# Altium PCB PCB1.PcbDoc (part 2 of 2)
Units mm, origin at the board's own origin, x right, y up, seen from the top; angles counter-clockwise.
Board outline 120.73 x 162.56 mm, 2 copper layers (Top Layer, Bottom Layer); 171 components, 125 nets, 579 pads, 168 vias.
Unrouted connection lines stored in the file: 14.
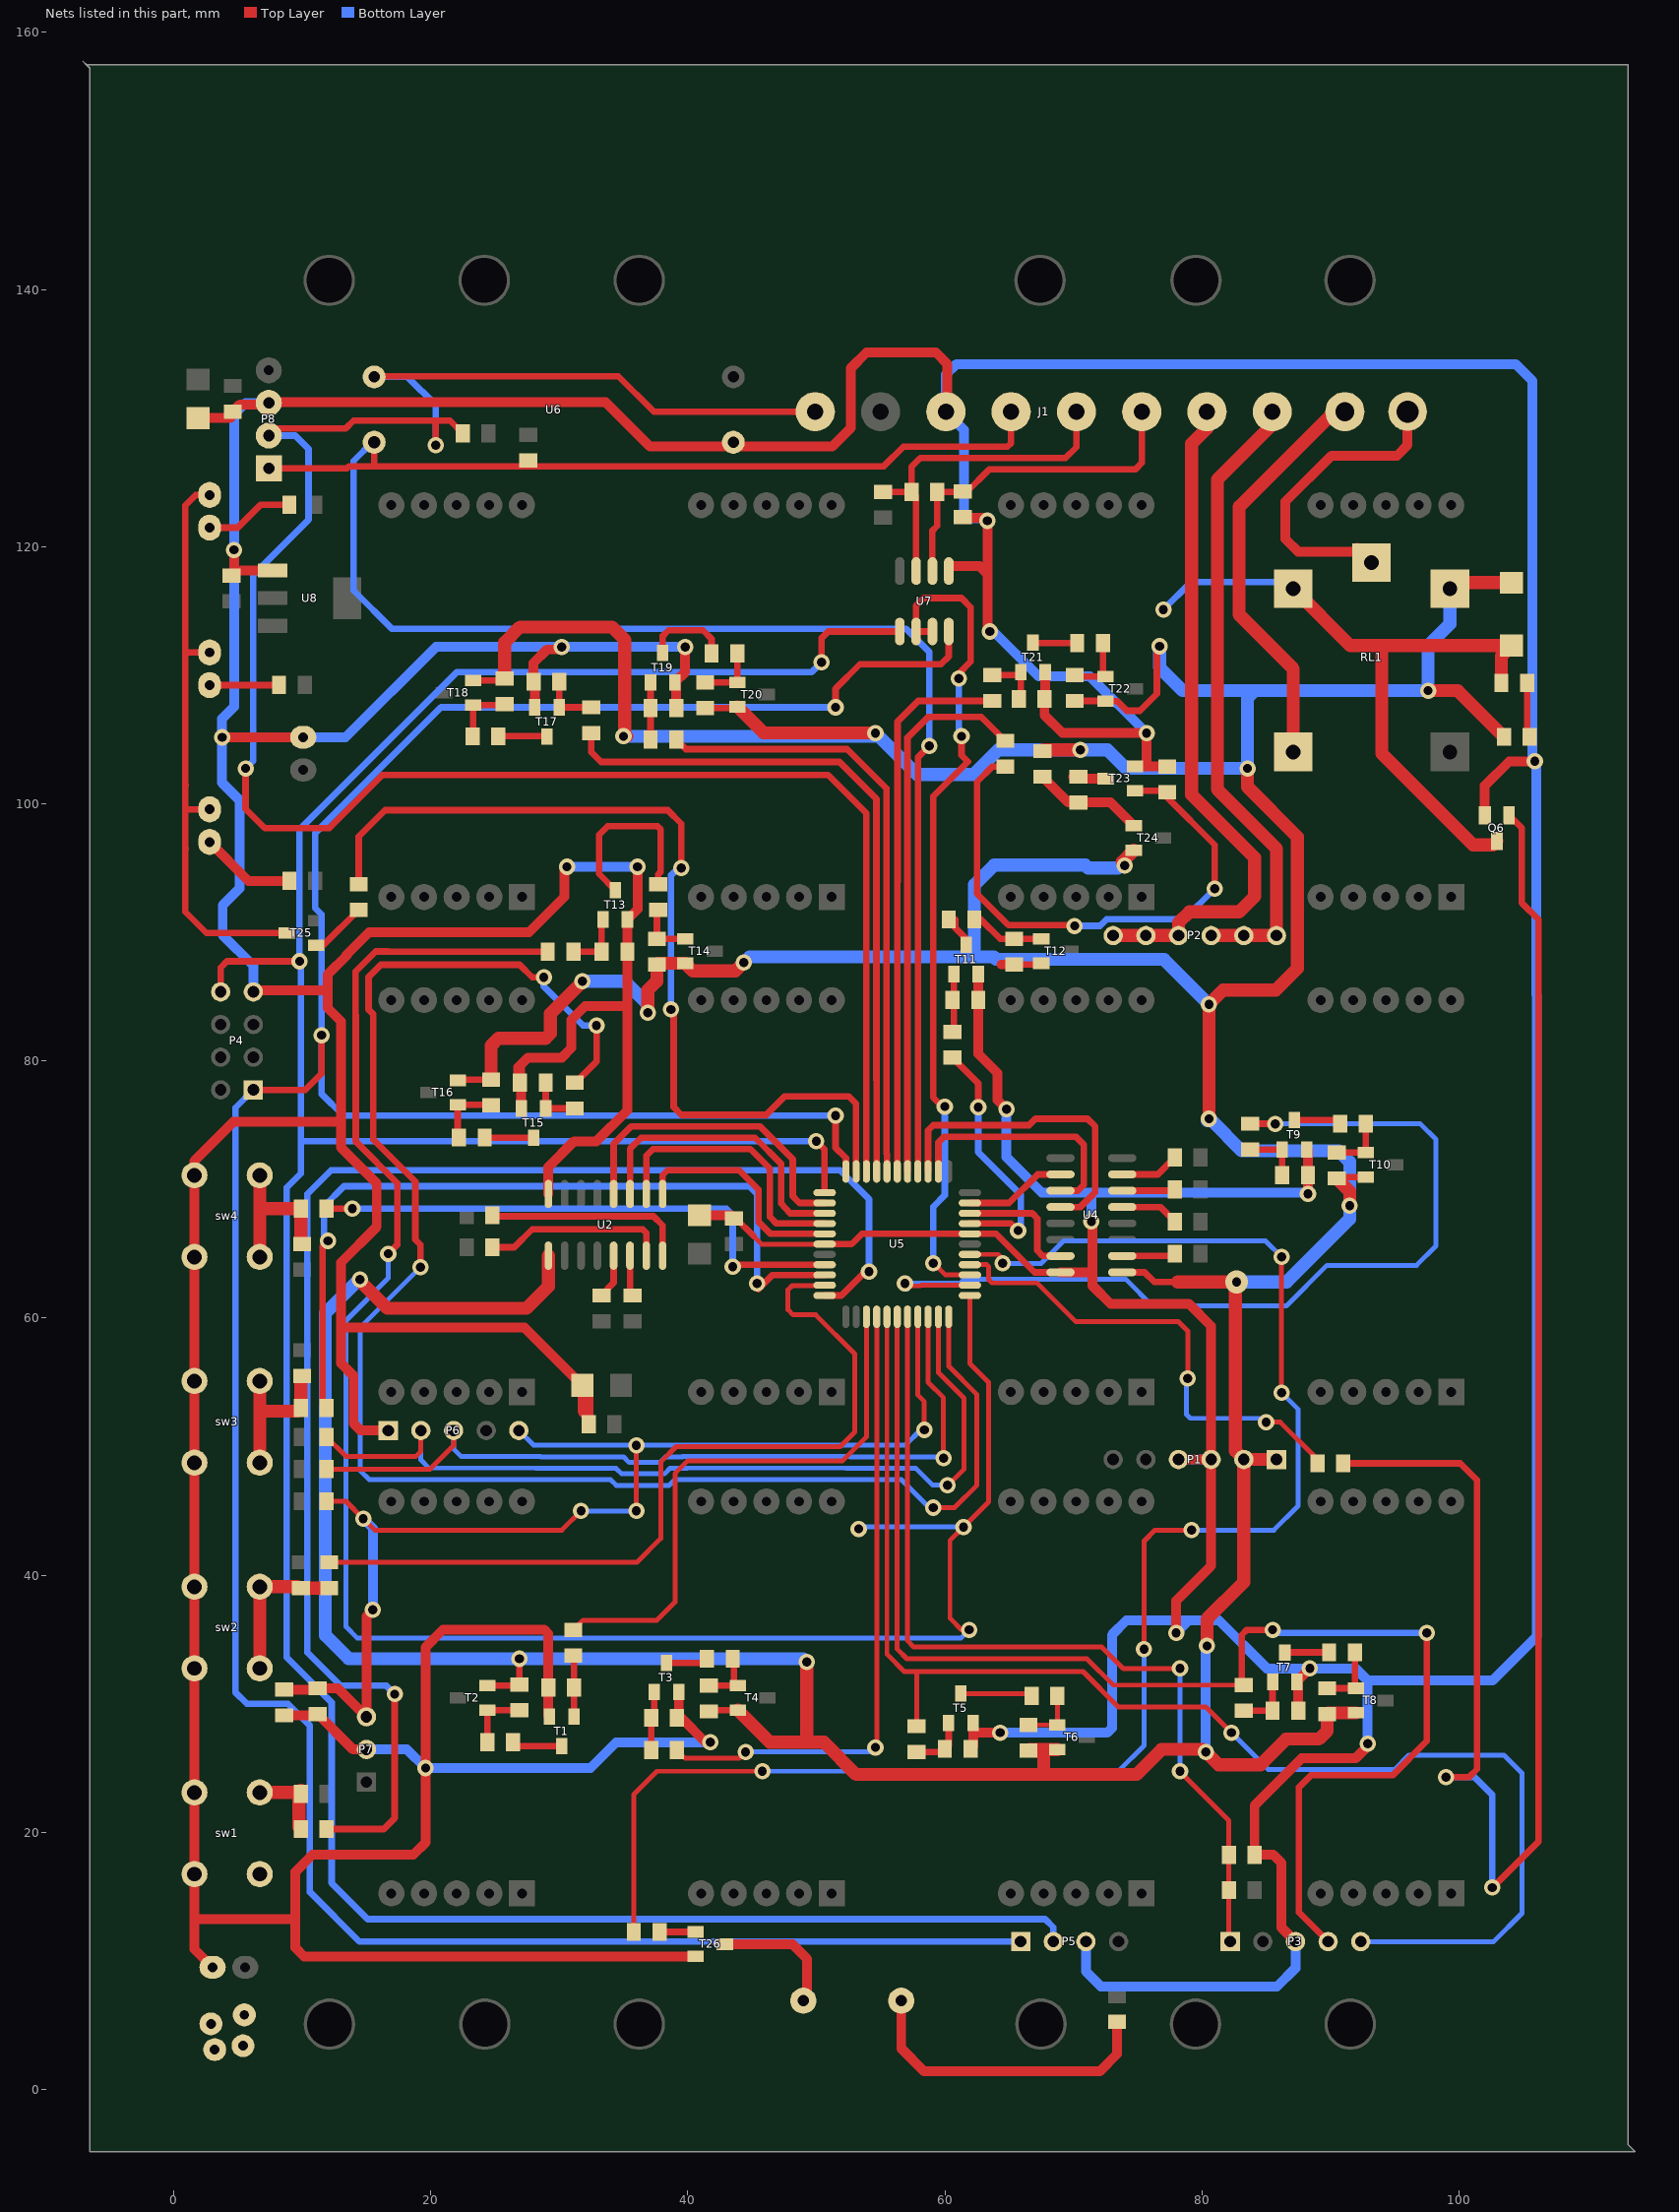
[diagram p2: the nets of this part, all layers, seen from the top]

## Via types
v1: diameter 1.27, hole 0.711, Top Layer to Bottom Layer, 114 vias
v2: diameter 1.524, hole 0.711, Top Layer to Bottom Layer, 53 vias
v3: diameter 1.778, hole 0.711, Top Layer to Bottom Layer, 1 vias

## Nets (pads, with @x,y where several pads share a name; then routed paths per layer and width w, separated by ;. In a path a pad name is that pad's centre, name@x,y a point inside that pad or via, vN(x,y) a via of type N, cw(c..) or ccw(c..) an arc to the next point about the centre after c; other vN are vias at no path point) (continued)
+12: D4.1 D5.2 P1.1 P1.2 R1.2 R2.2 R9.2 R10.2 R17.2 R18.2 R25.2 R26.2 R33.2 R34.2 R41.2 R42.2 RL1.3 T2.2 T4.2 T6.2 T8.2 T10.2 T12.2 T14.2 T16.2 T18.2 T20.2 T22.2 T24.2 U2.9 U4.9 | length 524.9
  Top Layer w0.508: v1@14.5,62.889 v1(14.5,63) ; T16.2@22.1,78.485 22.165,78.55 R26.2@24.7,78.55 ; T18.2@23.31,109.585 R33.2@25.585,109.585 ; T2.2@24.4,31.405 26.805,31.405 R1.2@26.9,31.5 v1(26.9,33.5) ; R34.2@41.35,107.45 T20.2@43.755,107.45 ; R2.2@41.65,29.4 41.745,29.495 T4.2@43.9,29.495 ; R18.2@65.4,87.5 67.405,87.5 T12.2@67.5,87.595 T12.2@67.627,87.468 ; R41.2@70.1,108 72.495,108 T22.2@72.5,107.995 73.389,107.995 74.151,107.233 75.183,107.233 76.5,108.55 76.5,112.25 v1(76.7,112.25) ; U4.9@73.8,63.555 75.545,63.555 76.3,62.8 78.1,62.8 ; R10.2@89.75,29.2 R10.2@89.845,29.295 ; R17.2@90.5,70.861 90.595,70.956 T10.2@92.75,70.956
  Top Layer w0.762: 64.4,87.5 R18.2@65.4,87.5
  Top Layer w1.016: v1@14.5,62.889 16.639,60.75 27.45,60.75 29.155,62.455 U2.9@29.155,64.85 ; R26.2@24.7,78.55 24.7,81.18 25.27,81.75 28.943,81.75 29.323,82.13 29.323,83.677 31.8,86.154 v1(31.8,86.202) ; R33.2@25.75,109.75 25.75,112.55 26.95,113.75 34.1,113.75 35.1,112.75 35.1,105.4 35.25,105.25 v1(35,105.25) ; v1(36.9,83.75) 36.9,85.5 37.6,86.2 R25.2@37.6,87.5 37.695,87.595 T14.2@39.8,87.595 40.395,87 43.7,87 v1(44.35,87.65) ; T20.2@43.85,107.545 45.879,105.516 54.584,105.516 v1(54.6,105.5) ; T4.2@43.9,29.495 46.395,27 49,27 ; v1(49.25,33.25) 49.25,27.25 49,27 ; R9.2@66.5,26.35 66.595,26.445 67.7,26.445 ; R42.2@67.6,104.1 67.7,104.2 v1(70.543,104.2) ; T6.2@68.75,26.445 67.7,26.445 ; v1(74,95.2) 74,95.26 73.783,95.478 T24.2@74.7,96.395 ; 78.1,62.8 v3@82.6,62.8 ; v1(80.4,34.5) 80.4,36.6 83.26,39.46 P1.2@83.26,49 ; v1(80.55,75.5) v1(80.55,84.4) 81.65,85.5 85.75,85.5 87.439,87.189 87.439,97.411 83.55,101.3 v1(83.55,102.75) ; v3(82.7,62.8) v3@82.6,62.8 ; P1.1@85.8,49 P1.2@83.26,49 ; R10.2@89.75,29.2 89.75,27.9 89.1,27.25 86.55,27.25 84.55,25.25 81.3,25.25 v1(80.3,26.25) 80.1,26.45 76.85,26.45 74.9,24.5 67.35,24.5 ; R10.2@89.845,29.295 T8.2@92,29.295 ; R17.2@90.5,70.861 91.5,69.861 v1(91.5,68.75) ; v1(97.6,108.8) 99.9,108.8 D4.1@103.5,105.2 ; RL1.3@99.296,116.734 99.762,117.2 D5.2@104.1,117.2 ; 49,27 50.6,27 53.1,24.5 67.35,24.5 ; 67.35,24.5 67.7,24.85 67.7,26.445 ; v3@82.6,62.8 82.6,49.66 P1.2@83.26,49
  Bottom Layer w0.508: v1(76.7,112.25) v1@76.95,112
  Bottom Layer w0.762: v1@14.411,63 v1(14.5,63) ; 32.6,86.2 32.602,86.202 32.65,86.25 ; v1@44.35,87.5 v1(44.35,87.65) 44.8,88.1 ; v1@49,33.5 v1(49.25,33.25) ; v1(80.3,26.25) 80.3,34.2 80.5,34.4 v1(80.4,34.5)
  Bottom Layer w1.016: v1@14.411,63 11.8,60.389 11.8,35.3 13.6,33.5 v1(26.9,33.5) v1@49,33.5 ; v1(31.8,86.202) 32.602,86.202 35.098,86.202 36.9,84.4 v1(36.9,83.75) ; v1(35,105.25) v1@54.85,105.25 ; 44.8,88.1 62.3,88.1 ; v1(54.6,105.5) v1@54.85,105.25 ; v1(74,95.2) 73.97,95.23 73.681,95.23 73.457,95.006 71.142,95.006 70.918,95.23 63.83,95.23 62.3,93.7 62.3,88.1 ; v1(76.7,112.25) 76.7,110.6 78.5,108.8 84.1,108.8 ; v1(80.55,75.5) 80.4,75.35 80.75,75.35 83.1,73 90.639,73 91.5,72.139 v1(91.5,68.75) 91.5,67.7 86.6,62.8 v3(82.7,62.8) ; v1(80.55,84.4) 77.05,87.9 64,87.9 63.8,88.1 62.3,88.1 ; P1.2@83.26,49 P1.1@85.8,49 ; RL1.3@99.296,116.734 99.296,113.996 97.6,112.3 v1(97.6,108.8) 84.1,108.8 ; v1@54.85,105.25 57.83,102.27 62.22,102.27 64.15,104.2 v1(70.543,104.2) 72.65,104.2 74.1,102.75 v1(83.55,102.75) 83.55,108.25 84.1,108.8
+24V: J1.8 P2.4 P2.5 P2.6 | length 49.5
  Top Layer w1.016: P2.4@80.72,89.75 P2.5@83.26,89.75 P2.6@85.8,89.75 85.8,96.52 81.2,101.12 81.2,125.2 85.48,129.48 J1.8@85.48,130.5
COM: J2.1 RL1.2 | length 25.1
  Top Layer w0.762: RL1.2@93.2,118.766 RL1.2@92.366,119.6 ; J2.1@96,130.5 96,129.2 96,127.9 95.176,127.076 93.876,127.076 90.076,127.076 86.5,123.5 86.5,120.6 87.5,119.6 RL1.2@91.766,119.6 ; RL1.2@91.766,119.6 92.066,119.9 RL1.2@92.366,119.6 ; RL1.2@91.766,119.6 RL1.2@92.366,119.6
GND: C1.2 C2.1 C3.2 C4.2 C5.1 C6.2 C7.2 C8.2 C9.2 C10.2 C11.1 J1.3 P1.3 P1.4 P3.3 P4.4 P5.3 P6.1 P7.2 P8.3 pad.0 pad.1 pad.2 pad.3 Q6.2 R7.2 R8.2 R15.2 R16.2 R23.2 R24.2 R31.2 R32.2 R39.2 R40.2 R47.2 R48.2 R72.1 R84.2 sw1.2 sw1.3 sw2.2 sw2.3 sw3.2 sw3.3 sw4.2 sw4.3 T1.2 T3.2 T5.2 T7.2 T9.2 T11.2 T13.2 T15.2 T17.2 T19.2 T21.2 T23.2 T26.2 U2.8 U4.8 U5.6 U5.29 U6.3 U7.5 U8.1 | length 981.7
  Top Layer w0.381: 45.124,66.374 45.748,65.75 U5.6@50.65,65.75
  Top Layer w0.508: C8.2@43.748,67.75 45.124,66.374 ; U5.6@50.65,65.75 52.75,65.75 53.55,66.55 U5.29@61.95,66.55 63.996,66.55 66.991,63.555 U4.8@69,63.555
  Top Layer w0.762: C1.2@2.3,130 4.4,130 C4.2@4.75,130.35 ; C6.2@3.03,9.5 1.62,10.91 1.62,13.25 ; v1(3.77,105.17) C7.2@10.082,105.17 ; C4.2@4.6,130.5 5.161,131.061 7.4,131.061 P8.3@7.4,131.18 7.444,131.224 33.626,131.224 37.05,127.8 51.25,127.8 52.7,129.25 52.7,133.9 53.9,135.1 59.3,135.1 60.2,134.2 60.2,130.62 J1.3@60.08,130.5 ; v1(4.7,119.75) C5.1@4.7,118.05 ; 5.3,118.15 U8.1@7.7,118.15 ; P4.4@6.2,85.37 6.33,85.5 12,85.5 ; C11.1@8.6,29.1 R84.2@11.1,29.1 ; R84.2@11.2,29.2 13.96,26.44 P7.2@15,26.44 ; 12.9,75.25 4.65,75.25 1.62,72.22 sw4.3@1.62,71.1 sw4.2@1.62,64.75 sw3.3@1.62,55.1 sw3.2@1.62,48.75 sw2.3@1.62,39.1 sw2.2@1.62,32.75 sw1.3@1.62,23.1 sw1.2@1.62,16.75 1.62,13.25 ; 13.2,59.25 27.3,59.25 C9.2@31.8,54.75 ; 13.45,88.25 15.2,90 27.639,90 30.4,92.761 30.4,94.95 30.55,95.1 v1(30.6,95.1) ; 13.483,88.217 12,86.734 12,85.5 ; P6.1@16.7,51.25 14.55,51.25 14,51.8 14,55.5 13.016,56.484 13.016,64.316 15.8,67.1 15.8,70.484 13.024,73.26 13.024,83.076 12,84.1 12,85.5 ; T15.2@27.045,76.3 27.045,78.205 R32.2@26.95,78.3 ; T17.2@28.095,107.5 28.095,109.405 R39.2@28,109.5 28,110.95 29.05,112 v1@29.95,112 ; U2.8@29.155,69.65 29.155,71.755 31.15,73.75 32.9,73.75 35.3,76.15 R31.2@35.3,88.5 35.3,90.995 T13.2@35.305,91 36.1,91.795 v1(36.1,95.1) ; T1.2@29.245,29 29.15,29.095 R7.2@29.15,31.25 29.15,35.45 28.85,35.75 20.95,35.75 19.6,34.4 v1(19.6,25) 19.6,19.2 18.65,18.25 10.8,18.25 9.475,16.925 9.475,13.25 ; v1@29.95,112.25 30.15,112.25 v1(30.2,112.2) ; C10.2@32.3,51.75 C10.2@32.3,52.239 ; 35.3,84.25 35.276,84.274 32.024,84.274 30.95,83.2 30.95,81 30.2,80.25 27.55,80.25 26.95,79.65 ; R40.2@39.1,107.45 39.1,109.355 T19.2@39.005,109.45 39.8,110.245 v1(39.8,112.2) ; T3.2@39.305,30.9 39.305,29.055 R8.2@39.15,28.9 39.5,28.9 41.4,27 v1(41.75,27) ; T26.2@40.6,10.345 10.155,10.345 9.475,11.025 9.475,13.25 ; C3.2@40.9,68 43.35,68 C8.2@43.6,67.75 C8.2@43.748,67.75 ; U7.5@60.305,118.5 62.7,118.5 63.316,117.884 ; R72.1@61.7,122.25 63.25,122.25 63.4,122.1 v1(63.316,122.016) 63.316,117.884 ; R15.2@62,26.5 62.205,26.705 62.205,27.75 ; T5.2@62.205,28.5 62.205,27.75 ; T11.2@62.605,86.75 62.605,84.755 R24.2@62.6,84.75 62.6,80.55 64.1,79.05 64.1,76.95 v1(64.8,76.25) v1@64.612,76.25 ; v1(63.5,113.4) 63.5,113.25 63.316,113.434 63.316,117.884 ; v1(64.3,27.75) 62.205,27.75 ; T21.2@67.805,110.25 67.805,108.205 R47.2@67.75,108.15 67.75,106.9 69.15,105.5 v1(75.7,105.5) ; U4.8@69,63.555 71.445,63.555 71.5,63.5 ; v1(71.4,67.5) 71.5,67.4 71.5,63.5 ; T23.2@74.8,102.905 74.805,102.9 75.7,102.9 ; v1@75.8,105.5 v1(75.7,105.5) ; R48.2@77.3,102.9 75.7,102.9 ; v1(78,35.5) 78,38 80.72,40.72 P1.3@80.72,49 ; P1.4@78.18,49 P1.3@80.72,49 ; P3.3@87.28,11.5 86.2,12.58 86.2,17.6 85.55,18.25 C2.1@84.1,18.25 84.1,22.1 87.75,25.75 91.95,25.75 92.9,26.7 v1(92.9,26.9) ; R16.2@87.5,29.45 87.5,31.605 T7.2@87.405,31.7 87.405,31.755 v1(88.4,32.75) ; T9.2@88.155,73.111 88.25,73.016 R23.2@88.25,71.111 v1(88.25,69.65) ; Q6.2@102,99.1 102,101.4 103.9,103.3 v1(105.9,103.3) ; 1.62,13.25 9.475,13.25 ; C5.1@4.7,118.05 4.7,117.95 C5.1@4.5,117.75 4.45,117.8 C5.1@4.7,118.05 ; R32.2@26.95,78.3 26.95,79.65 ; R32.2@26.95,78.3 26.8,78.45 26.8,79.5 26.95,79.65 ; C9.2@31.8,54.75 31.8,52.739 C10.2@32.3,52.239 ; C9.2@31.8,54.75 32.3,54.25 C10.2@32.3,52.239 ; 71.5,63.5 71.5,62.5 72.9,61.1 79,61.1 80.72,59.38 P1.3@80.72,49 ; 75.7,102.9 v1(75.7,105.5)
  Bottom Layer w0.762: 5.13,100.25 5.13,93.43 3.816,92.116 3.816,89.784 6.2,87.4 P4.4@6.2,85.37 ; 5.15,100.25 3.77,101.63 v1(3.77,105.17) 3.77,106.62 4.7,107.55 v1(4.7,119.75) 4.7,130.3 5.58,131.18 P8.3@7.4,131.18 ; C7.2@10.082,105.17 13.37,105.17 20.4,112.2 ; P7.2@15,26.44 18.16,26.44 v1(19.6,25) 32.432,25 34.432,27 v1(41.75,27) ; 21.8,112.2 20.4,112.2 ; v1(30.6,95.1) v1(36.1,95.1) ; v1(39.8,112.2) v1(30.2,112.2) 20.4,112.2 ; v1(63.316,122.016) 63.5,122.2 61.5,122.2 61.5,129.08 J1.3@60.08,130.5 60.08,133.38 60.9,134.2 104.4,134.2 105.7,132.9 v1@105.7,103.6 ; v1(63.5,113.4) 63.8,113.4 67.3,109.9 71.3,109.9 v1(75.7,105.5) ; v1(64.3,27.75) 72.65,27.75 73,28.1 73,35.35 74.134,36.484 78.984,36.484 ; v1(64.8,76.25) 64.8,72.5 ; 66.675,70.625 64.8,72.5 ; P5.3@70.98,11.5 70.98,9.17 72.15,8 85.85,8 87.28,9.43 P3.3@87.28,11.5 ; v1(71.4,67.5) 71.4,69.55 71.5,69.65 71.212,69.65 71.112,69.75 ; v1(78,35.5) 78.984,36.484 ; P1.4@78.18,49 P1.3@80.72,49 ; v1(88.25,69.65) 88.15,69.75 71.112,69.75 ; v1(92.9,26.9) 92.9,31.8 ; v1(105.9,103.3) 106,103.3 106,85.136 106.043,85.092 106.043,35.243 102.6,31.8 92.9,31.8 ; 64.8,72.5 67.55,69.75 71.112,69.75 ; 78.984,36.484 81.316,36.484 85.05,32.75 v1(88.4,32.75) 91.95,32.75 92.9,31.8
HEADER_G: J1.7 P2.1 P2.2 P2.3 | length 53.1
  Top Layer w1.016: P2.1@73.1,89.75 P2.2@75.64,89.75 P2.3@78.18,89.75 78.18,90.752 79.028,91.6 82.9,91.6 84.1,92.8 84.1,95.8 79.2,100.7 79.2,128 80.4,129.2 J1.7@80.4,130.5
MLRC: C2.2 P3.1 R57.1 U5.18 | length 70.2
  Top Layer w0.381: U5.18@57.1,60.1 57.1,34.9 57.58,34.42 72.2,34.42 73.9,32.72 78.27,32.72 v1(78.3,32.75) ; v1(78.3,24.75) 78.3,24.7 82.1,20.9 C2.2@82.1,18.25 R57.1@82.1,15.5 82.1,11.6 P3.1@82.2,11.5
  Bottom Layer w0.381: v1(78.3,24.75) v1(78.3,32.75)
NetBZ1_1: BZ1.1 R67.1 | length 24.3
  Top Layer w0.762: BZ1.1@56.61,6.9 56.61,3.19 58.4,1.4 72.05,1.4 73.4,2.75 R67.1@73.4,5.25
NetBZ1_2: BZ1.2 T26.3 | length 9.3
  Top Layer w0.762: T26.3@42.886,11.298 48.152,11.298 49.29,10.16 BZ1.2@49.29,7.75
NetD1_1: D1.1 D2.1 D3.1 T25.3 | length 46.1
  Top Layer w0.508: 0.93,96.52 0.9,96.55 ; 0.948,101.452 0.9,101.5 ; 1.17,99.57 D3.1@2.8,99.57 ; D2.1@2.8,111.77 0.92,111.77 0.9,111.75 ; D1.1@2.8,124.02 1.72,124.02 0.9,123.2 0.9,111.75 ; T25.3@8.814,89.952 2.548,89.952 0.9,91.6 0.9,96.55 ; 0.9,96.55 0.9,101.5 ; 0.9,101.5 0.9,111.75
NetD1_2: D1.2 R62.1 | length 6.9
  Top Layer w0.508: D1.2@2.8,121.48 4.98,121.48 6.75,123.25 R62.1@9,123.25
NetD2_2: D2.2 R63.1 | length 5.4
  Top Layer w0.508: D2.2@2.8,109.23 8.18,109.23 R63.1@8.2,109.25
NetD3_2: D3.2 R65.1 | length 7.5
  Top Layer w0.508: R65.1@8.98,93.98 R65.1@9,94
  Top Layer w0.762: D3.2@2.8,97.03 5.83,94 R65.1@9,94
NetD4_2: D4.2 R61.2@105.3,109.4 | length 4.3
  Top Layer w0.508: R61.2@105.3,109.4 105.3,105.4 D4.2@105.5,105.2
NetD5_1: D5.1 Q6.3 R61.1@103.3,109.4 RL1.1 | length 53.7
  Top Layer w1.016: RL1.1@87.104,116.734 91.538,112.3 94,112.3 ; Q6.3@102.95,97.1 102.65,96.8 101.1,96.8 94,103.9 94,112.3 ; R61.1@103.3,109.4 103.3,111.5 D5.1@104.1,112.3 94,112.3
  Bottom Layer w0.508: v1(77,115.1) 79.134,117.234 RL1.1@87.304,117.234
NetJ1_5: J1.5 R58.2 R81.2 U7.7 | length 26.7
  Top Layer w0.508: R81.2@55.2,124.25 R58.2@57.4,124.25 ; U7.7@57.765,118.1 57.765,123.885 R58.2@57.4,124.25 ; J1.5@70.24,130.5 70.24,127.74 69.389,126.889 58.089,126.889 57.4,126.2 R58.2@57.4,124.25
NetJ1_6: J1.6 R58.1 R72.2 U7.6 | length 27.1
  Top Layer w0.508: U7.6@59.035,118.1 59.035,121.25 59.4,121.615 R58.1@59.4,124.25 61.7,124.25 63.45,126 74.81,126 75.32,126.51 J1.6@75.32,130.5
NetJ2_2: J2.2 RL1.5 | length 32.1
  Top Layer w1.016: RL1.5@87.104,104.034 87.104,110.496 82.9,114.7 82.9,123.1 90.3,130.5 J2.2@91.123,130.5
NetQ6_1: Q6.1 R71.1 | length 135.1
  Top Layer w0.508: R71.1@91,48.7 100.1,48.7 101.4,47.4 101.4,24.9 100.8,24.3 v1(99,24.3) ; v1(102.6,15.7) 106.2,19.3 ; Q6.1@103.9,99.1 104.9,98.1 104.9,92.278 106.2,90.978 106.2,19.3 ; 106.2,21.1 106.2,19.3
  Bottom Layer w0.508: v1(99,24.3) 101.2,24.3 102.6,22.9 v1(102.6,15.7)
NetR1_1: R1.1 R4.1 T2.1 | length 5
  Top Layer w0.508: R4.1@24.4,27 T2.1@24.4,29.5 R1.1@26.9,29.5
NetR2_1: R2.1 R6.1 T4.1 | length 4.7
  Top Layer w0.508: R2.1@41.65,31.4 T4.1@43.9,31.4 43.6,31.7 43.6,33.45 R6.1@43.4,33.65
NetR3_1: R3.1 R7.1 T1.1 | length 4.7
  Top Layer w0.508: T1.1@31.15,29 R7.1@31.15,31.25 R3.1@31.15,33.75
NetR4_2: R4.2 T1.3 | length 3.9
  Top Layer w0.508: R4.2@26.4,27 26.686,26.714 T1.3@30.197,26.714
NetR5_1: R5.1 R8.1 T3.1 | length 4.6
  Top Layer w0.508: R5.1@37.15,26.4 R8.1@37.15,28.9 37.4,29.15 T3.1@37.4,30.9
NetR6_2: R6.2 T3.3 | length 3.3
  Top Layer w0.508: T3.3@38.352,33.186 41.186,33.186 R6.2@41.5,33.5
NetR9_1: R9.1 R12.1 T6.1 | length 4.5
  Top Layer w0.381: R9.1@66.5,28.35 T6.1@68.75,28.35 R12.1@68.75,30.6
NetR10_1: R10.1 R14.1 T8.1 | length 5.1
  Top Layer w0.508: R10.1@89.75,31.2 T8.1@92,31.2 91.9,31.3 R14.1@91.9,34
NetR11_1: R11.1 R15.1 T5.1 | length 4.5
  Top Layer w0.381: R15.1@59.8,26.25 R15.1@60.3,26.75
  Top Layer w0.508: R11.1@57.8,26.25 R15.1@59.8,26.25 ; R15.1@60.3,26.75 T5.1@60.3,28.5
NetR12_2: R12.2 T5.3 | length 5.6
  Top Layer w0.381: T5.3@61.252,30.786 65.836,30.786 66.564,30.786 R12.2@66.75,30.6
NetR13_1: R13.1 R16.1 T7.1 | length 4.5
  Top Layer w0.508: R13.1@83.25,29.45 R16.1@85.5,29.45 T7.1@85.5,31.7
NetR14_2: R14.2 T7.3 | length 3.5
  Top Layer w0.508: T7.3@86.452,33.986 86.466,34 R14.2@89.9,34
NetR17_1: R17.1 R20.1 T10.1 | length 4.5
  Top Layer w0.508: R17.1@90.5,72.861 T10.1@92.75,72.861 R20.1@92.75,75.111
NetR18_1: R18.1 R22.1 T12.1 | length 5.3
  Top Layer w0.508: R22.1@62.8,91 64.3,89.5 R18.1@65.4,89.5 T12.1@67.5,89.5
NetR19_1: R19.1 R23.1 T9.1 | length 4.5
  Top Layer w0.508: R19.1@83.75,73.111 T9.1@86.25,73.111 R23.1@86.25,71.111
NetR20_2: R20.2 T9.3 | length 3.7
  Top Layer w0.508: T9.3@87.202,75.397 90.464,75.397 R20.2@90.75,75.111
NetR21_1: R21.1 R24.1 T11.1 | length 4.3
  Top Layer w0.508: R21.1@60.6,82.5 60.7,82.6 T11.1@60.7,86.75
NetR22_2: R22.2 T11.3 | length 2.3
  Top Layer w0.508: R22.2@60.8,91 60.8,90.35 61.653,89.497 T11.3@61.653,89.036
NetR25_1: R25.1 R28.1 T14.1 | length 4.5
  Top Layer w0.508: R28.1@37.7,91.75 37.6,91.65 R25.1@37.6,89.5 T14.1@39.8,89.5
NetR26_1: R26.1 R30.1 T16.1 | length 5.2
  Top Layer w0.508: R30.1@22.2,74.05 22.1,74.15 T16.1@22.1,76.58 24.67,76.58 R26.1@24.7,76.55
NetR27_1: R27.1 R31.1 T13.1 | length 4.7
  Top Layer w0.508: R27.1@31.1,88.5 R31.1@33.3,88.5 33.3,90.9 T13.1@33.4,91
NetR28_2: R28.2 T13.3 | length 14.3
  Top Layer w0.508: T13.3@34.352,93.286 33.1,94.539 33.1,97.6 33.75,98.25 37.65,98.25 37.9,98 37.9,94.719 37.7,94.519 R28.2@37.7,93.75
NetR29_1: R29.1 R32.1 T15.1 | length 4.3
  Top Layer w0.508: R32.1@28.95,78.3 T15.1@28.95,76.3 R29.1@31.2,76.3
NetR30_2: R30.2 T15.3 | length 3.8
  Top Layer w0.508: R30.2@24.2,74.05 24.236,74.014 T15.3@27.997,74.014
NetR33_1: R33.1 R36.1 T18.1 | length 4.9
  Top Layer w0.508: R36.1@23.25,105.25 23.31,105.31 T18.1@23.31,107.68 25.68,107.68 R33.1@25.75,107.75
NetR34_1: R34.1 R38.1 T20.1 | length 4.8
  Top Layer w0.508: R34.1@41.35,109.45 T20.1@43.85,109.45 R38.1@43.85,111.7
NetR35_1: R35.1 R39.1 T17.1 | length 4.2
  Top Layer w0.508: R39.1@30,109.5 T17.1@30,107.5 R35.1@32.25,107.5
NetR36_2: R36.2 T17.3 | length 3.8
  Top Layer w0.508: R36.2@25.25,105.25 29.011,105.25 T17.3@29.047,105.214
NetR37_1: R37.1 R40.1 T19.1 | length 4.5
  Top Layer w0.508: R37.1@37.1,105 R40.1@37.1,107.45 T19.1@37.1,109.45
NetR38_2: R38.2 T19.3 | length 6.7
  Top Layer w0.508: T19.3@38.053,111.736 38.053,113.053 38.5,113.5 41.175,113.5 41.85,112.825 R38.2@41.85,111.7
NetR41_1: R41.1 R44.1 T22.1 | length 5.1
  Top Layer w0.508: R41.1@70.1,110 70.2,109.9 T22.1@72.5,109.9 72.3,110.1 R44.1@72.3,112.5
NetR42_1: R42.1 R46.1 T24.1 | length 8.7
  Top Layer w0.762: R42.1@67.6,102.1 69.6,100.1 R46.1@70.4,100.1 72.9,100.1 T24.1@74.7,98.3
NetR43_1: R43.1 R47.1 T21.1 | length 4.5
  Top Layer w0.508: R43.1@63.7,110 65.65,110 T21.1@65.9,110.25 65.9,108.3 R47.1@65.75,108.15
NetR44_2: R44.2 T21.3 | length 3.5
  Top Layer w0.508: T21.3@66.853,112.536 66.888,112.5 R44.2@70.3,112.5
NetR45_1: R45.1 R48.1 T23.1 | length 43.7
  Top Layer w0.508: R45.1@64.7,102.9 63.7,102.9 62.5,101.7 62.5,93 64.942,90.558 70.042,90.558 v1(70.1,90.5) ; T23.1@74.8,101 77.2,101 R48.1@77.3,100.9 77.3,100.5 81,96.8 v1(81,93.4)
  Bottom Layer w0.508: v1(70.1,90.5) 72.071,90.5 72.579,91.008 78.608,91.008 v1(81,93.4)
NetR46_2: R46.2 T23.3 | length 2.6
  Top Layer w0.762: R46.2@70,102.1 70.148,101.953 T23.3@72.514,101.953
NetR49_1: R49.1 U2.16 | length 16
  Top Layer w0.508: R49.1@24.8,68 24.8,67.915 37.335,67.915 38.045,67.205 U2.16@38.045,64.85
NetR50_1: R50.1 U2.15 | length 14.4
  Top Layer w0.508: R50.1@24.8,65.5 26.501,65.5 27.9,66.899 36.501,66.899 36.775,66.625 U2.15@36.775,64.85
NetR51_1: R51.1 U2.14 | length 3.2
  Top Layer w0.508: U2.14@35.505,64.85 35.505,61.945 R51.1@35.7,61.75
NetR52_1: R52.1 U2.13 | length 3.5
  Top Layer w0.508: R52.1@33.3,61.75 33.3,61.815 34.235,62.75 U2.13@34.235,64.85
NetR53_1: R53.1 U4.15 | length 4.6
  Top Layer w0.508: U4.15@73.8,71.175 76.575,71.175 R53.1@77.9,72.5
NetR54_1: R54.1 U4.14 | length 4.1
  Top Layer w0.508: U4.14@73.8,69.905 77.805,69.905 R54.1@77.9,70
NetR55_1: R55.1 U4.13 | length 4.6
  Top Layer w0.508: U4.13@73.8,68.635 76.765,68.635 R55.1@77.9,67.5
NetR56_1: R56.1 U4.10 | length 4.2
  Top Layer w0.508: U4.10@73.8,64.825 77.725,64.825 R56.1@77.9,65
NetR61_2: R61.2@14.4,91.75 T25.1 | length 4.4
  Top Layer w0.508: T25.1@11.1,89 11.65,89 R61.2@14.4,91.75
NetR64_1: R64.1 R73.1 sw1.1 sw1.4 | length 6.2
  Top Layer w1.016: sw1.4@6.7,23.1 R73.1@9.75,23.1 ; R64.1@9.9,20.25 9.75,20.4 R73.1@9.75,23.1 ; R73.1@9.9,23.25 R73.1@9.75,23.1
NetR66_1: R66.1 R74.1 sw2.1 sw2.4 | length 11.4
  Top Layer w1.016: sw2.1@6.7,32.75 sw2.4@6.7,39.1 R74.1@9.6,39.1 ; R74.1@9.9,39 R66.1@12.1,39
NetR68_2: R68.2 T26.1 | length 2.8
  Top Layer w0.508: R68.2@37.8,12.25 T26.1@40.6,12.25
NetR69_1: R69.1 R75.1 sw3.1 sw3.4 | length 12.2
  Top Layer w1.016: sw3.1@6.7,48.75 6.7,52.75 ; sw3.4@6.7,55.1 6.7,52.75 ; R75.1@9.9,55.5 R69.1@9.9,53 9.65,52.75 6.7,52.75
NetR70_1: R70.1 R76.1 sw4.1 sw4.4 | length 12.4
  Top Layer w1.016: sw4.1@6.7,64.75 6.7,68.25 ; sw4.4@6.7,71.1 6.7,68.25 ; R76.1@9.8,65.75 9.9,65.85 R70.1@9.9,68.5 6.95,68.5 6.7,68.25
NetR71_2: R71.2 U5.26 | length 38.2
  Top Layer w0.381: U5.26@61.95,64.15 63.25,64.15 63.421,63.979 63.421,62.98 63.671,62.73 67.17,62.73 70.189,59.711 78.19,59.711 78.9,59 v1(78.9,55.3) ; v1(85,51.9) 86.1,51.9 89,49 R71.2@89,48.7
  Bottom Layer w0.381: v1(78.9,55.3) 78.8,55.2 78.8,52.5 79.1,52.2 84.7,52.2 v1(85,51.9)
RA0: C11.2 P6.5 P7.3 R77.1 R84.1 U5.19 | length 95.5
  Top Layer w0.381: R77.1@11.9,45.75 13.4,45.75 v1(14.75,44.4) 15.65,43.5 30.2,43.5 v1(31.7,45) ; v1(36,45) v1(36,50.1) ; U5.19@57.9,60.1 57.9,54 58.4,53.5 v1(58.4,51.3)
  Top Layer w0.762: C11.2@8.6,31.1 R84.1@11.2,31.1 ; R84.1@11.2,31.2 12.78,31.2 P7.3@15,28.98 15,36.8 v1(15.5,37.3)
  Bottom Layer w0.381: P6.5@26.86,51.25 27.998,50.111 28.915,50.111 28.926,50.1 v1(36,50.1) 39.214,50.1 39.225,50.111 47.935,50.111 53.015,50.111 53.026,50.1 56.926,50.1 58.126,51.3 v1(58.4,51.3) ; v1(31.7,45) v1(36,45)
  Bottom Layer w0.762: v1(14.75,44.4) 15.5,43.65 v1(15.5,37.3)
RA1: P6.3 R59.2 U5.20 | length 63.5
  Top Layer w0.381: R59.2@11.9,48.25 19.95,48.25 21.78,50.08 P6.3@21.78,51.25 ; U5.20@58.7,60.1 58.7,55 59.9,53.8 v1(59.9,49.1)
  Bottom Layer w0.381: P6.3@21.78,51.25 21.78,49.82 22.378,49.222 28.547,49.222 28.558,49.211 35.003,49.211 35.448,48.766 37.819,48.766 38.264,49.211 39.582,49.211 39.593,49.222 52.647,49.222 52.658,49.211 59.789,49.211 v1(59.9,49.1)
RA2: P6.2 R60.2 U5.21 | length 68.7
  Top Layer w0.381: R60.2@11.9,50.75 13.4,49.25 18.85,49.25 19.24,49.64 P6.2@19.24,51.25 ; U5.21@59.5,60.1 59.5,55.75 61.5,53.75 61.5,48.25 60.25,47 v1(60.2,47)
  Bottom Layer w0.381: P6.2@19.24,51.25 19.24,48.96 19.867,48.333 28.178,48.333 28.193,48.319 34.412,48.319 34.854,47.877 38.187,47.877 38.632,48.322 39.95,48.322 39.962,48.333 52.278,48.333 52.29,48.322 57.728,48.322 59.05,47 v1(60.2,47)
RA3_SEGMENT_CONTROL_8: R29.2 U5.22 | length 131.6
  Top Layer w0.381: v1(59.1,45.25) 60.75,45.25 62.5,47 62.5,54.05 60.3,56.25 U5.22@60.3,60.1
  Top Layer w0.508: v1(19.2,63.95) 19.2,65.7 18.8,66.1 18.8,70.616 15.543,73.873 15.543,83.61 15.162,83.991 15.162,86.525 16.121,87.484 26.916,87.484 27.892,86.508 v1@28.392,86.508 ; R29.2@31.2,78.3 31.25,78.3 32.9,79.95 v1(32.9,82.75)
  Bottom Layer w0.381: v1(19.2,63.95) 14.5,59.25 14.5,48.15 15.206,47.444 27.81,47.444 27.824,47.43 33.99,47.43 34.432,46.988 38.556,46.988 39,47.433 40.318,47.433 40.33,47.444 41.75,47.444 41.762,47.433 42.858,47.433 42.87,47.444 44.29,47.444 44.302,47.433 45.398,47.433 45.41,47.444 46.83,47.444 46.842,47.433 47.938,47.433 47.95,47.444 49.37,47.444 49.382,47.433 50.478,47.433 50.49,47.444 51.91,47.444 51.922,47.433 56.617,47.433 58.8,45.25 v1(59.1,45.25)
  Bottom Layer w0.508: v1(28.8,86.508) 28.8,85.8 31.85,82.75 v1(32.9,82.75)
RA4_SEGMENT_CONTROL_7: R27.2 U5.23 | length 156
  Top Layer w0.381: v1@53.2,43.5 v1(53.3,43.6) ; v1(61.9,35.75) 61.3,35.75 60.4,36.65 60.4,42.7 v1(61.45,43.75) 63.4,45.7 63.4,55 61.95,56.45 U5.23@61.95,61.75
  Top Layer w0.508: v1(16.7,65) 17.4,65.7 17.4,70.5 14.167,73.733 14.167,83.549 14.146,83.57 14.146,86.946 15.716,88.516 16.671,88.516 16.687,88.5 R27.2@29.1,88.5
  Bottom Layer w0.381: v1(16.7,65) 16.7,63.1 13.4,59.8 13.4,36 14.3,35.1 61.25,35.1 v1(61.9,35.75) ; v1@53.3,43.5 v1@53.4,43.6 ; v1(53.3,43.6) v1@53.4,43.6 ; v1(61.45,43.75) 53.55,43.75 v1@53.4,43.6
RA5_SEGMENT_CONTROL_5: R19.2 U5.24 | length 73.5
  Top Layer w0.381: v1(56.9,62.7) 57.1,62.5 58.094,62.5 58.144,62.55 U5.24@61.95,62.55
  Top Layer w0.508: R19.2@83.75,75.111 85.689,75.111 v1(85.7,75.1)
  Bottom Layer w0.381: v1@57.1,62.25 56.65,62.7 v1(56.9,62.7) 61.175,62.7 61.475,63 74.1,63 76.148,60.952 86.587,60.952 89.735,64.1 96.7,64.1 98.2,65.6 98.2,73.9 97,75.1 v1(85.7,75.1)
RA6_DATA_LINE_H: U4.7 U5.31 | length 9.9
  Top Layer w0.508: U5.31@61.95,68.15 65.3,68.15 66.8,68.15 67.2,67.75 67.2,65.25 67.625,64.825 U4.7@69,64.825
RA7_SEGMENT_CONTROL_6: R21.2 U5.30 | length 19.8
  Top Layer w0.508: R21.2@60.6,80.25 62.6,78.25 v1(62.6,76.4) ; U5.30@61.95,67.35 65.15,67.35 v1(65.7,66.8)
  Bottom Layer w0.508: v1@62.6,76.5 v1(62.6,76.4) 62.6,72.9 65.9,69.6 65.9,67 v1(65.7,66.8)
RB1_SW3: R69.2 U5.9 | length 63.8
  Top Layer w0.508: R69.2@11.9,53 11.6,53.3 11.6,65.6 v1(12,66) ; v1(45.4,62.7) 45.4,62.35 45.5,62.25 46.6,63.35 U5.9@50.65,63.35
  Bottom Layer w0.508: v1(12,66) 11.702,66.298 11.702,68.702 13.25,70.25 44.8,70.25 45.4,69.65 45.4,62.75 v1(45.4,62.7)
RB2_SW2: R66.2 U5.10 | length 65.8
  Top Layer w0.381: R66.2@12.1,41 36.05,41 37.9,42.85 37.9,48.8 39.1,50 51.85,50 53,51.15 53,57.2 49.95,60.25 48.2,60.25 47.8,60.65 47.8,62.2 48.125,62.525 49.627,62.525 50.625,62.525 U5.10@50.65,62.55
RB3_SW1: R64.2 U5.11 | length 114.4
  Top Layer w0.508: R64.2@11.9,20.25 16.35,20.25 17.2,21.1 v1(17.2,30.75) ; U5.11@50.65,61.75 51.95,61.75 53.8,63.6 v1(54.1,63.6)
  Bottom Layer w0.508: v1(17.2,30.75) 16.55,31.4 13,31.4 10.4,34 10.4,69.65 12.25,71.5 51.85,71.5 54.1,69.25 v1(54.1,63.6)
RB4_SEGMENT_CONTROL_1: R3.2 U5.14 | length 44.6
  Top Layer w0.381: R3.2@31.1,35.75 31.85,36.5 37.6,36.5 39,37.9 39,47.9 40,48.9 52.05,48.9 53.9,50.75 53.9,58.75 ; 53.9,58.339 53.9,58.75 ; U5.14@53.9,60.1 53.9,58.75
RB5_SEGMENT_CONTROL_2: R5.2 U5.15 | length 49.8
  Top Layer w0.381: R5.2@39.15,26.4 39.8,25.75 44,25.75 v1(44.5,26.25) ; v1(54.6,26.6) 54.7,26.7 U5.15@54.7,60.1 U5.15@54.6,60
  Bottom Layer w0.381: v1(44.5,26.25) 54.25,26.25 v1(54.6,26.6)
RB6_SEGMENT_CONTROL_3: P3.5 R11.2 U5.16 | length 109
  Top Layer w0.381: U5.16@55.5,60.1 55.5,33.85 56.85,32.5 57.7,32.5 ; R11.2@57.8,28.25 57.8,32.4 57.7,32.5 ; v1(82.3,27.75) 80.3,29.75 73.5,29.75 70.75,32.5 57.7,32.5
  Bottom Layer w0.381: v1(82.3,27.75) 85.15,24.9 95,24.9 96.1,26 103.5,26 104.9,24.6 104.9,13.7 102.7,11.5 P3.5@92.36,11.5
RB7_SEGMENT_CONTROL_4: P3.4 R13.2 U5.17 | length 105.7
  Top Layer w0.381: U5.17@56.3,60.1 56.3,34.25 57.05,33.5 71.05,33.5 73.1,31.45 R13.2@83.25,31.45
  Top Layer w0.508: R13.2@83.25,31.45 83.1,31.6 83.1,35.35 83.5,35.75 v1(85.5,35.75) ; P3.4@89.82,11.5 87.552,13.768 87.552,23.503 88.486,24.436 94.836,24.436 97.5,27.1 v1(97.5,35.5)
  Bottom Layer w0.381: v1@97.25,35.75 v1(97.5,35.5)
  Bottom Layer w0.508: v1(85.5,35.75) 85.75,35.5 v1(97.5,35.5)
RBO_SW4: R70.2 U5.8 | length 43
  Top Layer w0.508: R70.2@11.9,68.5 v1(13.9,68.5) ; v1(43.5,64) 43.65,64.15 U5.8@50.65,64.15
  Bottom Layer w0.508: v1(13.9,68.5) 43,68.5 43.5,68 v1(43.5,64)
RC0_DATA_LINE_E: U4.2 U5.32 | length 8
  Top Layer w0.508: U5.32@61.95,68.95 65,68.95 67.225,71.175 U4.2@69,71.175
RC1_DATA_LINE_F: U4.3 U5.35 | length 19.1
  Top Layer w0.508: U5.35@59.5,71.4 59.5,73.661 59.95,74.111 70.189,74.111 70.8,73.5 70.8,70.35 70.355,69.905 U4.3@69,69.905
RC2_DATA_LINE_G: U4.4 U5.36 | length 26.5
  Top Layer w0.508: U5.36@58.7,71.4 58.7,74.6 59.1,75 66.55,75 67.05,75.5 71.1,75.5 71.689,74.911 71.689,69.793 71.5,69.604 ; U4.4@69,68.635 70.531,68.635 ; 70.531,68.635 71.5,69.604 ; 70.531,68.635 70.585,68.635 71.5,69.55 71.5,69.604
RC5_LED_SWITCHING: R61.1@14.4,93.75 U5.43 | length 73.5
  Top Layer w0.508: R61.1@14.4,93.75 14.4,97.45 16.45,99.5 38.45,99.5 39.5,98.45 v1(39.5,95) ; v1(38.7,84) 38.85,84 38.9,83.95 38.9,76.406 39.5,75.806 46.106,75.806 47.55,77.25 52.511,77.25 53.1,76.661 U5.43@53.1,71.4
  Bottom Layer w0.508: v1(38.7,84) 38.7,94.45 39.4,95.15 39.5,95.05 v1(39.5,95)
RC6_TX: P4.1 P5.1 U5.44 U7.4 | length 256.6
  Top Layer w0.508: P4.1@6.2,77.75 10.25,77.75 11.5,79 v1(11.5,82) ; v1(51.5,75.75) 51.5,73.25 52.3,72.45 U5.44@52.3,71.4 ; v1(51.5,107.5) 51.5,108.95 53.4,110.85 59.7,110.85 60.305,111.455 U7.4@60.305,113.4
  Bottom Layer w0.508: P4.1@6.2,77.75 4.809,76.359 4.809,76.344 4.803,76.338 4.803,30.897 5.7,30 8.9,30 10.6,28.3 10.6,15.35 14.45,11.5 P5.1@65.9,11.5 ; v1(51.5,75.75) 13.2,75.75 11.5,77.45 v1(11.5,82) 11.5,91.4 11,91.9 11,97.7 20.8,107.5 v1(51.5,107.5)
RC7_RX: P4.8 P5.2 U5.1 U7.1 | length 249
  Top Layer w0.508: P4.8@3.66,85.37 3.66,87.26 4.15,87.75 v1(9.8,87.75) ; v1(50,73.75) 50.65,73.1 U5.1@50.65,69.75 ; v1(50.4,111) 50.4,112.875 50.925,113.4 U7.1@56.495,113.4
  Bottom Layer w0.508: 9.8,71.15 8.8,70.15 8.8,33.6 12.3,30.1 12.3,16.05 15.1,13.25 67.8,13.25 68.44,12.61 P5.2@68.44,11.5 ; 9.9,71.25 9.9,87.65 v1(9.8,87.75) 9.8,98 22.05,110.25 49.65,110.25 v1(50.4,111) ; 10.143,73.75 v1(50,73.75)
RD0_SEGMENT_CONTROL_12: R45.2 U5.38 | length 42.6
  Top Layer w0.508: U5.38@57.1,71.4 57.087,71.413 57.087,105.137 58.7,106.75 62.85,106.75 R45.2@64.6,105
RD1_SEGMENT_CONTROL_11: R43.2 U5.39 | length 43
  Top Layer w0.508: U5.39@56.3,71.4 56.3,85.657 56.323,102 56.323,106.396 57.928,108 R43.2@63.7,108
RD2_SEGMENT_CONTROL_10: R37.2 U5.40 | length 47.7
  Top Layer w0.508: R37.2@39.1,105 39.85,104.25 52.4,104.25 55.462,101.188 55.462,72.788 55.5,72.75 U5.40@55.5,71.4
"RD3 _SEGMENT_ CONTROL_9": R35.2 U5.41 | length 58.4
  Top Layer w0.508: R35.2@32.5,105.5 32.5,104 33.25,103.25 51.8,103.25 54.676,100.374 54.676,81.25 ; 54.676,85.5 U5.41@54.7,71.4
RD4_DATA_LINE_D: U2.4 U5.2 | length 25
  Top Layer w0.508: U2.4@34.235,69.65 34.235,73.535 35.617,74.917 45.605,74.917 48.167,72.355 48.167,69.483 48.611,69.039 48.7,68.95 U5.2@50.65,68.95
RD5_DATA_LINE_C: U2.3 U5.3 | length 23.3
  Top Layer w0.508: U2.3@35.505,69.65 35.505,73.155 36.378,74.028 45.236,74.028 47.278,71.986 47.278,68.9 47.95,68.15 U5.3@50.65,68.15
RD6_DATA_LINE_B: U2.2 U5.4 | length 21.7
  Top Layer w0.508: U2.2@36.775,69.65 36.775,72.625 37.289,73.139 44.868,73.139 46.389,71.618 46.389,67.868 46.907,67.35 U5.4@50.65,67.35
RD7_DATA_LINE_A: U2.1 U5.5 | length 17.7
  Top Layer w0.508: U2.1@38.045,69.65 38.045,71.115 38.43,71.5 44,71.5 45.5,70 45.5,67.5 46.45,66.55 U5.5@50.65,66.55
RE0: U5.25 U7.2 U7.3 | length 65
  Top Layer w0.381: v1(59.1,64.25) 59.15,64.25 60.05,63.35 U5.25@61.95,63.35
  Top Layer w0.508: U7.3@59.035,113.4 U7.2@57.765,113.4 57.765,115.415 58.35,116 61.3,116 62,115.3 62,111.05 61.1,110.15 v1(61.1,109.75) ; v1(60,76.45) 59.8,76.45 59.1,77.15 59.1,100.576 61.8,103.276 61.3,103.776 v1(61.3,105.25)
  Bottom Layer w0.508: v1(59.1,64.25) 59.1,68.65 60,69.55 v1(60,76.45) ; v1(61.1,109.75) 61.1,105.45 v1(61.3,105.25)
RE2_BUZZER: R68.1 U5.27 | length 127.4
  Top Layer w0.381: R68.1@35.8,12.25 35.8,22.95 37.6,24.75 v1(45.8,24.75) ; U5.27@61.95,64.95 64.15,64.95 64.5,64.6 v1(64.5,64.25) ; v1(75.5,34.25) 75.5,37.25 ; 75.5,37.25 75.5,42.65 76.35,43.5 v1(79.2,43.5) ; v1@85.85,65.1 v1(86.2,64.75) v1(86.2,54.2)
  Bottom Layer w0.381: v1(45.8,24.75) 73.5,24.75 75.5,26.75 v1(75.5,34.25) ; v1@64.5,64.3 v1(64.5,64.25) 67.5,64.25 69.25,66 84.95,66 v1(86.2,64.75) ; v1(79.2,43.5) 85.6,43.5 87.5,45.4 87.5,52.9 v1(86.2,54.2)
SCL: J1.4 P8.1 R82.2 U5.37 U6.2 | length 162.6
  Top Layer w0.508: P8.1@7.4,126.1 13.5,126.1 13.65,126.25 15.6,126.25 ; U6.2@15.6,128.12 15.6,126.25 ; U5.37@57.9,71.4 57.9,103.6 v1(58.8,104.5) ; J1.4@65.16,130.5 65.16,128.06 64.878,127.778 56.778,127.778 55.25,126.25 15.6,126.25
  Bottom Layer w0.508: U6.2@15.5,128.17 14,126.67 14,116.6 17,113.6 57,113.6 58.8,111.8 v1(58.8,104.5)
SDA: J1.1 P8.2 R83.2 U5.42 U6.1 | length 179.7
  Top Layer w0.508: v1(5.6,102.75) 5.6,99.6 7.1,98.1 12.1,98.1 16.238,102.238 ; P8.2@7.4,128.64 7.96,129.2 13.4,129.2 14,129.8 21.5,129.8 R83.2@22.5,128.8 ; U6.1@15.25,133.5 15.5,133.25 34.6,133.25 37.35,130.5 J1.1@49.92,130.5 ; 20,102.238 16.238,102.238 ; 20.3,129.8 20.4,129.7 v1(20.4,127.9) ; U5.42@53.9,71.4 53.9,99.25 50.912,102.238 16.238,102.238
  Bottom Layer w0.508: v1(5.6,102.75) 6.2,103.35 6.2,117.8 10.5,122.1 10.5,127.6 9.46,128.64 P8.2@7.4,128.64 ; U6.1@15.6,133.2 18.2,133.2 20.4,131 v1(20.4,127.9)
pads on no net: M1. M2. M3. M4. M5. M6. M7. M8. M9. M10. M11. M12. P4.2 P4.3 RL1.4 U2.5 U2.6 U2.7 U2.10 U2.11 U2.12 U4.1 U4.5 U4.6 U4.11 U4.12 U4.16 U5.12 U5.13 U5.33 U5.34 U8.4

## Polygon pours and split planes (outlines as drawn)
GND on Top Layer "Mechanical 1-No Net" (solid, remove dead copper, pour order 4): 106.1,145.2 106.1,1.2 106.2,1.1 106.1,1 85.4,1 0.6,1 0.6,29.3 0.6,145 0.5,145.1
GND on Bottom Layer "Mechanical 1-No Net" (solid, remove dead copper, pour order 6): 106.3,1.1 106.3,145.3 106.2,145.4 90.2,145.4 0.5,145.4 0.5,138 0.5,0.9

## Silkscreen, mask and mechanical layers (free items; w line width, h text height)
Top Overlay:
  lines w0.127: 65.6,99.4 66.711,100.511 66.711,101.351
  text "HUMI-SENSOR" at 47.5,137 h1.52
  text "RS-485" at 69.7,136.5 h1.27
  text "-24V+" at 80.6,136.5 h1.27
  text "SDA" at 48.4,135 h1.27
  text "+5V" at 52.9,135 h1.27
  text "G" at 59.6,135 h1.27
  text "SCL" at 63.5,135 h1.27
  text "B" at 69.9,134.75 h1.27
  text "A" at 74.9,134.75 h1.27
  text "+5V" at 9.1,133.2 h1.02
  text "G" at 9.6,131 h1.02
  text "SDA" at 9.46,128.64 h1.02
  text "SCL" at 9.7,125.8 h1.02
  text "RX" at 0.4,85 h1.02
  text "GND" at 7.9,85 h1.02
  text "3V3" at 2,79 h1.02 r90
  text "TX" at 7.9,77.25 h1.02
  text "VACCUM" at 18.7,48.5 h1.02
  text "VACCUM" at 17.8,23.5 h1.02 r90
  text "WWW.RELIEFSYS.COM" at 10.7,9.6 h1.27
  text "RES." at 80.4,8.75 h1.02
  text "RB7" at 88.6,8.75 h1.02
  text "RB6" at 92.1,8.75 h1.02
  text "TX" at 64.7,8.5 h1.27
  text "RX" at 67.5,8.5 h1.27
  text "G" at 70.5,8.5 h1.27
  text "+5V" at 72,8.5 h1.27
  text "+5V" at 85.1,7.25 h1.02 r90
  text "GND" at 87.8,7.25 h1.02 r90
Bottom Overlay:
  lines w0.127: 12.96,135.25 45.44,135.25 45.472,135.282 45.472,126.392 12.96,126.392 12.96,135.282
  text "HUMI-SENSOR" at 63.5,137 h1.52
  text "RS-485" at 76.8,136.6 h1.27
  text "+24V-" at 86.5,136.3 h1.27
  text "WWW.RELIEFSYS.COM" at 30.8,9.5 h1.27
Mechanical 1:
  lines w0.254: 85.8,89.194 85.86,89.254 ; -0.3,0 -0.3,145.796 107,145.796 107,0 -0.3,0

## Dimensions
110.3,145.8 to 109.9,0.1 on Top Overlay
-0.2,148.6 to 106.8,148.7 on Top Overlay